# EAGLE board aleph-interface130507 (EAGLE 6.4)
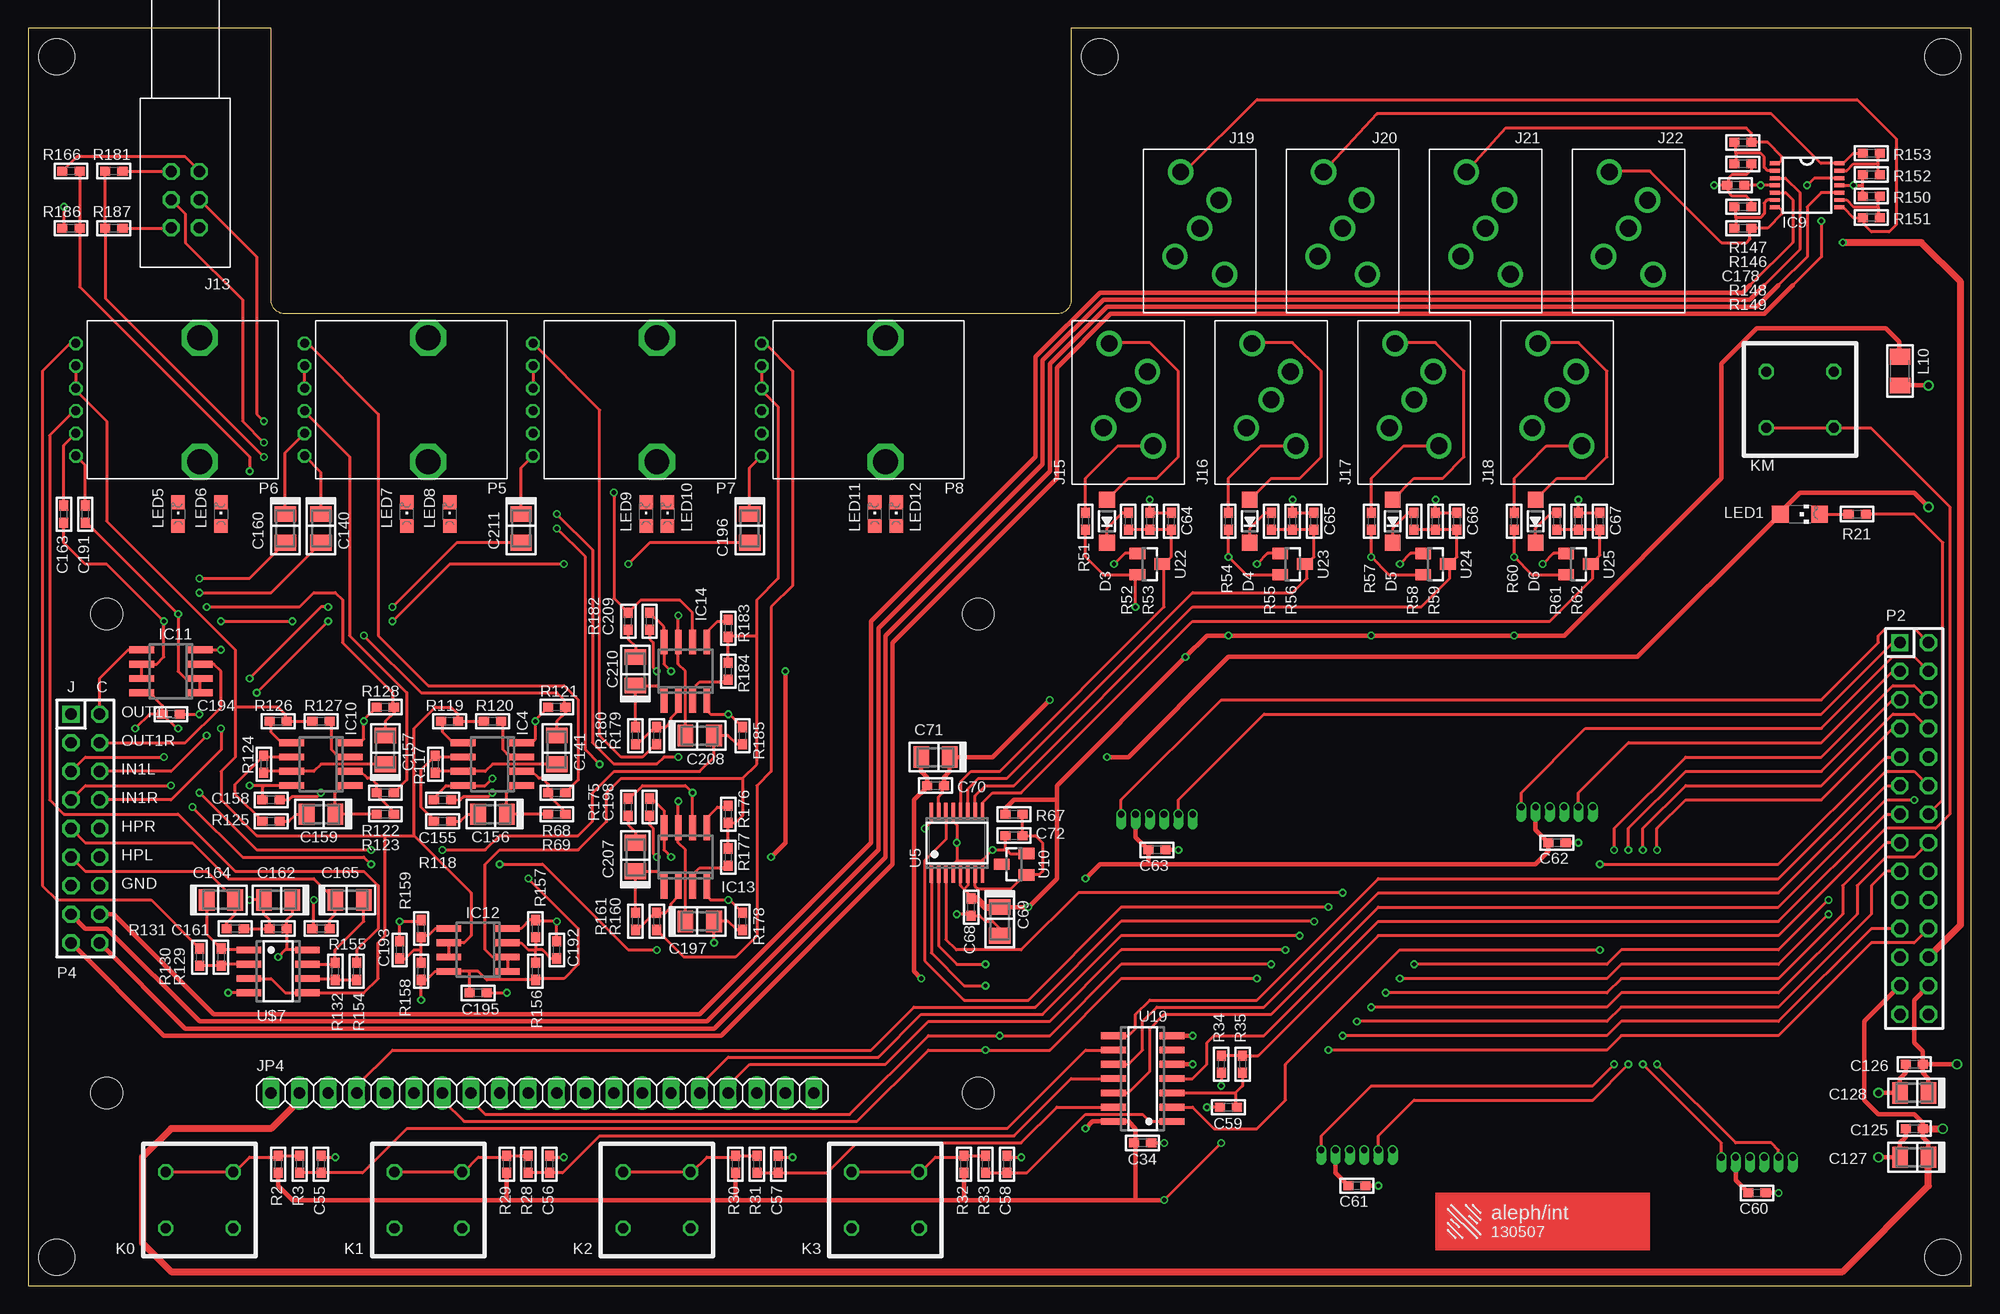
[diagram p0: board, top side]
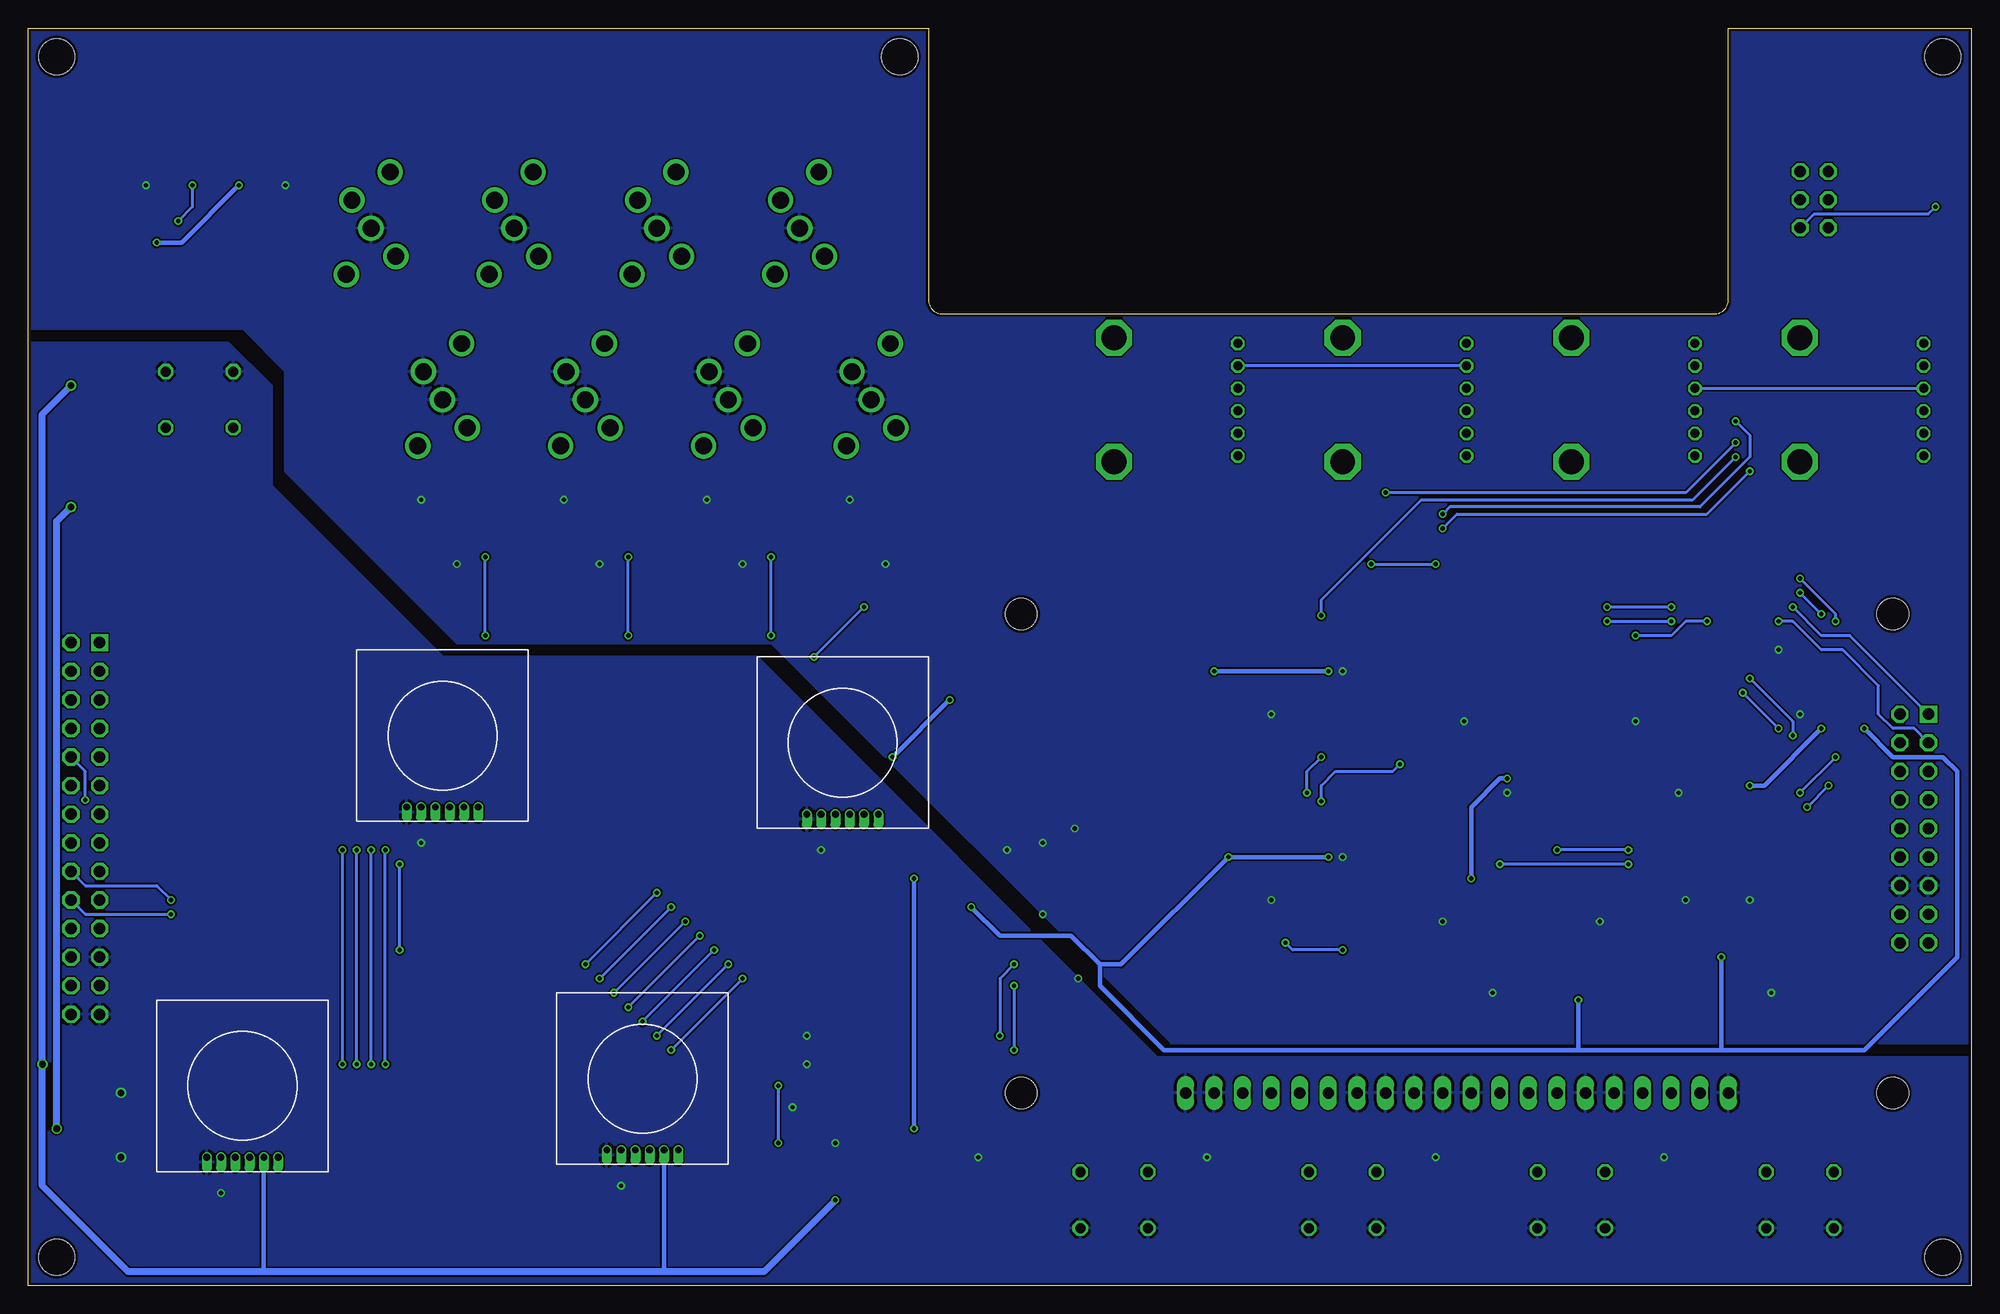
[diagram p1: board, bottom side, seen from below]

Size 172.72 x 111.76 mm. Coordinates in mm from the lower left corner, seen from the top.
Outline: 0,0 172.72,0 172.72,111.76 92.71,111.76 92.71,87.63 arc-90 91.44,86.36 22.86,86.36 arc-90 21.59,87.63 21.59,111.76 0,111.76 0,0
Copper layers (1*2+3*16): Top 0.035mm / dielectric 1.5mm / Route2 0.035mm / dielectric 0.15mm / Route3 0.035mm / dielectric 0.2mm / Bottom 0.035mm
Design rules "default *": minimum track width 6mil, minimum drill 15mil, track to track 6mil, track to pad 6mil, pad to pad 6mil, via to via 6mil, smd to smd 6mil, copper to edge 10mil, drill to drill 8mil, minimum pad ring 6mil, minimum via ring 6mil, stop-mask expansion 4mil, vias tented up to drill 0mil, thermal gap 10mil
Holes 3.2 mm at 2.54,2.54 2.54,109.22 170.18,109.22 170.18,2.54 95.25,109.22
Holes 2.8 mm at 6.99,59.69 84.45,59.69 84.45,17.14 6.99,17.14

## Footprints (pad centres in the part's own frame; a part is rotated, then mirrored left to right if it is on the bottom)
C0603 = smd 0.9 x 0.8: 1 -0.762,0; 2 0.762,0
C1206/T = smd 1.4 x 1.9: + 1.27,0; - -1.27,0
SOD123 = smd 1.4 x 1.4: A 1.905,0; C -1.905,0
SO8 = smd 0.6 x 2.2: 1 -1.905,-2.6; 2 -0.635,-2.6; 3 0.635,-2.6; 4 1.905,-2.6; 5 1.905,2.6; 6 0.635,2.6; 7 -0.635,2.6; 8 -1.905,2.6
TSSOP14 = smd 0.9 x 0.35: 1 -2.875,1.95; 2 -2.875,1.3; 3 -2.875,0.65; 4 -2.875,0; 5 -2.875,-0.65; 6 -2.875,-1.3; 7 -2.875,-1.95; 8 2.875,-1.95; 9 2.875,-1.3; 10 2.875,-0.65; 11 2.875,0; 12 2.875,0.65; 13 2.875,1.3; 14 2.875,1.95
PHA2U = drill 1 octagon: 0 -1.25,0; 1 -1.25,-2.5; 2 -1.25,2.5; _0 1.25,0; _1 1.25,-2.5; _2 1.25,2.5
STX-3680 = drill 1.5: 1 2.2,-4.1; 2 -2.2,-2.5; 3 1.7,2.5; 4 -1.7,5; 5 0,0
1X20 = drill 1.016 long: 1 -24.13,0; 2 -21.59,0; 3 -19.05,0; 4 -16.51,0; 5 -13.97,0; 6 -11.43,0; 7 -8.89,0; 8 -6.35,0; 9 -3.81,0; 10 -1.27,0; 11 1.27,0; 12 3.81,0; 13 6.35,0; 14 8.89,0; 15 11.43,0; 16 13.97,0; 17 16.51,0; 18 19.05,0; 19 21.59,0; 20 24.13,0
PVA1 = drill 0.9 octagon: 1 -3,-2.5; 2 -3,2.5; 3 3,2.5; 4 3,-2.5
L1206 = smd 1.4 x 1.8: 1 -1.27,0; 2 1.27,0
CHIPLED_1206 = smd 1.5 x 1.5: A 0,-1.75; C 0,1.75
CHIPLED_0805 = smd 1.2 x 1.2: A 0,-1.05; C 0,1.05
DIL-100-2X14 = drill 1.016 square: 1 -16.51,-1.27 | drill 1.016 octagon: 2 -16.51,1.27; 3 -13.97,-1.27; 4 -13.97,1.27; 5 -11.43,-1.27; 6 -11.43,1.27; 7 -8.89,-1.27; 8 -8.89,1.27; 9 -6.35,-1.27; 10 -6.35,1.27; 11 -3.81,-1.27; 12 -3.81,1.27; 13 -1.27,-1.27; 14 -1.27,1.27; 15 1.27,-1.27; 16 1.27,1.27; 17 3.81,-1.27; 18 3.81,1.27; 19 6.35,-1.27; 20 6.35,1.27; 21 8.89,-1.27; 22 8.89,1.27; 23 11.43,-1.27; 24 11.43,1.27; 25 13.97,-1.27; 26 13.97,1.27; 27 16.51,-1.27; 28 16.51,1.27
DIL-100-2X09 = drill 1.016 square: 1 -10.16,-1.27 | drill 1.016 octagon: 2 -10.16,1.27; 3 -7.62,-1.27; 4 -7.62,1.27; 5 -5.08,-1.27; 6 -5.08,1.27; 7 -2.54,-1.27; 8 -2.54,1.27; 9 0,-1.27; 10 0,1.27; 11 2.54,-1.27; 12 2.54,1.27; 13 5.08,-1.27; 14 5.08,1.27; 15 7.62,-1.27; 16 7.62,1.27; 17 10.16,-1.27; 18 10.16,1.27
EVJ-POT = drill 0.8 octagon: 1 -5,-11; 2 -3,-11; 3 -1,-11; 4 1,-11; 5 3,-11; 6 5,-11 | drill 2.2 octagon: M1 -5.5,0; M2 5.5,0
R0603 = smd 0.9 x 0.8: 1 -0.762,0; 2 0.762,0
TSSOP16 = smd 0.3 x 1.5: 1 -2.275,-2.8; 2 -1.625,-2.8; 3 -0.975,-2.8; 4 -0.325,-2.8; 5 0.325,-2.8; 6 0.975,-2.8; 7 1.625,-2.8; 8 2.275,-2.8; 9 2.275,2.8; 10 1.625,2.8; 11 0.975,2.8; 12 0.325,2.8; 13 -0.325,2.8; 14 -0.975,2.8; 15 -1.625,2.8; 16 -2.275,2.8
SOT23 = smd 1 x 1.4: 1 -0.95,-1.1; 2 0.95,-1.1; 3 0,1.1
SO14 = smd 0.6 x 2.2: 1 -3.81,-2.6; 2 -2.54,-2.6; 3 -1.27,-2.6; 4 0,-2.6; 5 1.27,-2.6; 6 2.54,-2.6; 7 3.81,-2.6; 8 3.81,2.6; 9 2.54,2.6; 10 1.27,2.6; 11 0,2.6; 12 -1.27,2.6; 13 -2.54,2.6; 14 -3.81,2.6
BOURNS-EM14 = drill 0.6 pad 0.813 offset: P$1 -3.175,-6.35; P$2 -1.905,-6.35; P$3 -0.635,-6.35; P$4 0.635,-6.35; P$5 1.905,-6.35; P$6 3.175,-6.35
SO08 = smd 0.6 x 2.2: 1 -1.905,-2.6; 2 -0.635,-2.6; 3 0.635,-2.6; 4 1.905,-2.6; 5 1.905,2.6; 6 0.635,2.6; 7 -0.635,2.6; 8 -1.905,2.6

## Placement (x,y rotation side)
C34  100n  [C0603]  99.06,12.7 180 top
C55  1u  [C0603]  26.04,10.79 270 top
C56  1u  [C0603]  46.35,10.79 270 top
C57  1u  [C0603]  66.67,10.79 270 top
C58  1u  [C0603]  87,10.79 270 top
C59  1u  [C0603]  106.68,15.88 0 top
C60  100n  [C0603]  153.67,8.26 180 top
C61  100n  [C0603]  118.11,8.89 180 top
C62  100n  [C0603]  135.89,39.37 180 top
C63  100n  [C0603]  100.33,38.73 180 top
C64  10n  [C0603]  101.6,67.94 90 top
C65  10n  [C0603]  114.3,67.94 90 top
C66  10n  [C0603]  127,67.94 90 top
C67  10n  [C0603]  139.7,67.94 90 top
C68  100n  [C0603]  83.82,33.66 90 top
C69  10u  [C1206/T]  86.36,32.38 90 top
C70  100n  [C0603]  80.64,44.45 0 top
C71  10u  [C1206/T]  80.64,46.99 0 top
C72  100n  [C0603]  87.63,40.01 0 top
C125  100n  [C0603]  167.64,13.97 0 top
C126  100n  [C0603]  167.64,19.68 0 top
C127  10u  [C1206/T]  167.64,11.43 0 top
C128  10u  [C1206/T]  167.64,17.14 0 top
C140  10u  [C1206/T]  26.04,67.31 90 top
C141  10u  [C1206/T]  46.99,47.62 270 top
C155  100n  [C0603]  36.83,43.18 180 top
C156  10u  [C1206/T]  41.27,41.91 0 top
C157  10u  [C1206/T]  31.75,47.62 270 top
C158  100n  [C0603]  21.59,43.18 180 top
C159  10u  [C1206/T]  26.04,41.91 0 top
C160  10u  [C1206/T]  22.86,67.31 90 top
C161  100n  [C0603]  22.23,31.75 0 top
C162  100u  [C1206/T]  22.23,34.29 0 top
C163  1u  [C0603]  3.17,68.58 270 top
C164  100u  [C1206/T]  17.14,34.29 180 top
C165  100u  [C1206/T]  28.57,34.29 180 top
C178  100n  [C0603]  151.76,97.79 180 top
C191  1u  [C0603]  5.08,68.58 270 top
C192  100n  [C0603]  46.99,29.84 270 top
C193  100n  [C0603]  33.02,29.84 270 top
C194  100n  [C0603]  12.7,50.8 180 top
C195  100n  [C0603]  40.01,26.04 180 top
C196  10u  [C1206/T]  64.14,67.31 90 top
C197  10u  [C1206/T]  59.69,32.38 180 top
C198  100n  [C0603]  55.24,42.55 90 top
C207  10u  [C1206/T]  53.98,38.1 270 top
C208  10u  [C1206/T]  59.69,48.9 180 top
C209  100n  [C0603]  55.24,59.05 90 top
C210  10u  [C1206/T]  53.98,54.61 270 top
C211  10u  [C1206/T]  43.81,67.31 90 top
D3  1N4148W-7  [SOD123]  95.89,67.94 90 top
D4  1N4148W-7  [SOD123]  108.58,67.94 90 top
D5  1N4148W-7  [SOD123]  121.28,67.94 90 top
D6  1N4148W-7  [SOD123]  133.99,67.94 90 top
IC4  AD8607R  [SO8]  41.27,46.35 90 top
IC9  AD8567  [TSSOP14]  158.12,97.79 0 top
IC10  AD8607R  [SO8]  26.04,46.35 90 top
IC11  AD8607R  [SO8]  12.7,54.61 90 top
IC12  AD8607R  [SO8]  40.01,29.84 90 top
IC13  AD8607R  [SO8]  58.42,38.1 0 top
IC14  AD8607R  [SO8]  58.42,54.61 0 top
J13  PHA2U  [PHA2U]  13.97,96.52 180 top
J15  STX-3680  [STX-3680]  97.79,78.74 0 top
J16  STX-3680  [STX-3680]  110.49,78.74 0 top
J17  STX-3680  [STX-3680]  123.19,78.74 0 top
J18  STX-3680  [STX-3680]  135.89,78.74 0 top
J19  STX-3680  [STX-3680]  104.14,93.98 0 top
J20  STX-3680  [STX-3680]  116.84,93.98 0 top
J21  STX-3680  [STX-3680]  129.54,93.98 0 top
J22  STX-3680  [STX-3680]  142.24,93.98 0 top
JP4  OLED  [1X20]  45.72,17.14 0 top
K0  PVA1  [PVA1]  15.24,7.62 180 top
K1  PVA1  [PVA1]  35.56,7.62 180 top
K2  PVA1  [PVA1]  55.88,7.62 180 top
K3  PVA1  [PVA1]  76.2,7.62 180 top
KM  PVA1  [PVA1]  157.48,78.74 0 top
L10  600  [L1206]  166.37,81.28 270 top
LED1  [CHIPLED_1206]  157.48,68.58 270 top
LED5  [CHIPLED_0805]  13.34,68.58 0 top
LED6  [CHIPLED_0805]  17.14,68.58 0 top
LED7  [CHIPLED_0805]  33.66,68.58 0 top
LED8  [CHIPLED_0805]  37.47,68.58 0 top
LED9  [CHIPLED_0805]  54.93,68.58 0 top
LED10  [CHIPLED_0805]  56.83,68.58 0 top
LED11  [CHIPLED_0805]  75.25,68.58 0 top
LED12  [CHIPLED_0805]  77.15,68.58 0 top
P2  M-2X14-DIL-100  [DIL-100-2X14]  167.64,40.64 270 top
P4  M-2X09-DIL-100  [DIL-100-2X09]  5.08,40.64 270 top
P5  EVJ-POT  [EVJ-POT]  35.56,78.74 270 top
P6  EVJ-POT  [EVJ-POT]  15.24,78.74 270 top
P7  EVJ-POT  [EVJ-POT]  55.88,78.74 270 top
P8  EVJ-POT  [EVJ-POT]  76.2,78.74 270 top
R2  82k  [R0603]  22.23,10.79 90 top
R3  18k  [R0603]  24.13,10.79 270 top
R21  150  [R0603]  162.56,68.58 180 top
R28  18k  [R0603]  44.45,10.79 270 top
R29  82k  [R0603]  42.55,10.79 90 top
R30  82k  [R0603]  62.87,10.79 90 top
R31  18k  [R0603]  64.77,10.79 90 top
R32  82k  [R0603]  83.19,10.79 90 top
R33  18k  [R0603]  85.09,10.79 90 top
R34  82k  [R0603]  106.05,19.68 90 top
R35  18k  [R0603]  107.95,19.68 90 top
R51  10k  [R0603]  93.98,67.94 270 top
R52  10k  [R0603]  97.79,67.94 90 top
R53  10k  [R0603]  99.69,67.94 90 top
R54  10k  [R0603]  106.68,67.94 270 top
R55  10k  [R0603]  110.49,67.94 90 top
R56  10k  [R0603]  112.39,67.94 90 top
R57  10k  [R0603]  119.38,67.94 270 top
R58  10k  [R0603]  123.19,67.94 90 top
R59  10k  [R0603]  125.09,67.94 90 top
R60  10k  [R0603]  132.08,67.94 270 top
R61  10k  [R0603]  135.89,67.94 90 top
R62  10k  [R0603]  137.79,67.94 90 top
R67  1k  [R0603]  87.63,41.91 0 top
R68  100k  [R0603]  46.99,43.81 180 top
R69  100k  [R0603]  46.99,41.91 180 top
R117  100k  [R0603]  36.2,46.35 270 top
R118  50k  [R0603]  36.83,41.27 180 top
R119  100k  [R0603]  37.47,50.16 180 top
R120  100k  [R0603]  41.27,50.16 0 top
R121  100k  [R0603]  46.99,51.44 0 top
R122  100k  [R0603]  31.75,43.81 180 top
R123  100k  [R0603]  31.75,41.91 180 top
R124  100k  [R0603]  20.95,46.35 270 top
R125  50k  [R0603]  21.59,41.27 180 top
R126  100k  [R0603]  22.23,50.16 180 top
R127  100k  [R0603]  26.04,50.16 0 top
R128  100k  [R0603]  31.75,51.44 0 top
R129  3k9  [R0603]  17.14,29.21 90 top
R130  3k9  [R0603]  15.24,29.21 270 top
R131  5k  [R0603]  18.41,31.75 180 top
R132  3k9  [R0603]  27.3,27.94 270 top
R146  10k  [R0603]  152.4,99.69 0 top
R147  10k  [R0603]  152.4,101.6 180 top
R148  10k  [R0603]  152.4,95.89 0 top
R149  10k  [R0603]  152.4,93.98 180 top
R150  10k  [R0603]  163.83,96.84 180 top
R151  10k  [R0603]  163.83,94.93 0 top
R152  10k  [R0603]  163.83,98.74 180 top
R153  10k  [R0603]  163.83,100.65 0 top
R154  3k9  [R0603]  29.21,27.94 90 top
R155  5k  [R0603]  26.04,31.75 180 top
R156  100k  [R0603]  45.09,27.94 270 top
R157  100k  [R0603]  45.09,31.75 270 top
R158  100k  [R0603]  34.92,27.94 270 top
R159  100k  [R0603]  34.92,31.75 270 top
R160  100k  [R0603]  55.88,32.38 90 top
R161  100k  [R0603]  53.98,32.38 90 top
R166  100k  [R0603]  3.81,99.06 0 top
R175  50k  [R0603]  53.34,42.55 90 top
R176  100k  [R0603]  62.23,41.91 90 top
R177  100k  [R0603]  62.23,38.1 270 top
R178  100k  [R0603]  63.5,32.38 270 top
R179  100k  [R0603]  55.88,48.9 90 top
R180  100k  [R0603]  53.98,48.9 90 top
R181  100k  [R0603]  7.62,99.06 180 top
R182  50k  [R0603]  53.34,59.05 90 top
R183  100k  [R0603]  62.23,58.42 90 top
R184  100k  [R0603]  62.23,54.61 270 top
R185  100k  [R0603]  63.5,48.9 270 top
R186  5M  [R0603]  3.81,93.98 0 top
R187  5M  [R0603]  7.62,93.98 180 top
U5  AD7923  [TSSOP16]  82.55,39.37 0 top
U10  LM4040M3  [SOT23]  87.63,37.47 90 top
U19  74HC14D  [SO14]  99.06,18.41 90 top
U22  BAS70-04  [SOT23]  99.69,64.14 270 top
U23  BAS70-04  [SOT23]  112.39,64.14 270 top
U24  BAS70-04  [SOT23]  125.09,64.14 270 top
U25  BAS70-04  [SOT23]  137.79,64.14 270 top
U$2  BOURNS-EM14  [BOURNS-EM14]  153.67,17.78 0 bottom
U$3  BOURNS-EM14  [BOURNS-EM14]  118.11,18.42 0 bottom
U$4  BOURNS-EM14  [BOURNS-EM14]  135.89,48.9 0 bottom
U$5  BOURNS-EM14  [BOURNS-EM14]  100.33,48.26 0 bottom
U$7  [SO08]  22.23,27.94 270 top

## Library data of the parts
C34 C55-C72 C125-C128 C140 C141 C155-C165 C178 C191-C198 C207-C211 L10 R2 R3 R21 R28-R35 R51-R62 R67-R69 R117-R132 R146-R161 R166 R175-R187 = rc-master-smd
D3-D6 U10 U22-U25 = diode
IC4 IC10-IC14 = analog-devices; MPN: AD8607ARMZ-R2; OC_FARNELL: 1651293; OC_NEWARK: 19M8927
IC9 = analog-devices; MPN: AD8544ARUZ; OC_FARNELL: unknown; OC_NEWARK: 15P1001
J13 J15-J22 K0 K1-K3 KM P5-P8 U5 U$2-U$5 U$7 = monome-inc
JP4 = pinhead
LED1 LED5-LED12 = led
P2 P4 = con-headers-jp
U19 = 74xx-us

## Nets
+3V3: C70.2 C71.+ C125.2 C127.+ JP4.2 LED1.A P2.25 U5.15
+5V: C34.2 C60.2 C61.2 C62.2 C63.2 C126.2 C128.+ L10.2 P2.26 R2.1 R29.1 R30.1 R32.1 R34.1 U19.14 U$2.P$5 U$3.P$5 U$4.P$5 U$5.P$5
+5VA: C68.2 C69.+ C155.2 C158.2 C161.2 C162.+ C194.2 C195.2 C198.2 C209.2 IC4.8 IC10.8 IC11.8 IC12.8 IC13.8 IC14.8 L10.1 R51.2 R54.2 R57.2 R60.2 R67.1 R156.2 R158.2 U5.5 U5.6 U22.2 U23.2 U24.2 U25.2 U$7.8
+12V: C178.1 IC9.4 P2.24
AGND: C64.2 C65.2 C66.2 C67.2 C68.1 C69.- C72.1 C155.1 C158.1 C161.1 C162.- C178.2 C192.1 C193.1 C194.1 C195.1 C198.1 C209.1 IC4.4 IC9.11 IC10.4 IC11.4 IC12.4 IC13.4 IC14.4 J15.3 J15.5 J16.3 J16.5 J17.3 J17.5 J18.3 J18.5 J19.5 J20.5 J21.5 J22.5 P4.13 P4.14 R53.2 R56.2 R59.2 R62.2 R121.1 R128.1 R131.1 R146.2 R148.2 R150.2 R152.2 R155.2 R157.1 R159.1 R178.1 R185.1 U5.4 U5.8 U5.13 U5.16 U10.2 U22.1 U23.1 U24.1 U25.1 U$7.4
CVOUT1^: IC9.3 P4.15
CVOUT2^: IC9.5 P4.16
CVOUT3^: IC9.10 P4.18
CVOUT4^: IC9.12 P4.17
ENC0A^: P2.7 U$2.P$2
ENC0B^: P2.8 U$2.P$6
ENC1A^: P2.5 U$3.P$2
ENC1B^: P2.6 U$3.P$6
ENC2A^: P2.3 U$4.P$2
ENC2B^: P2.4 U$4.P$6
ENC3A^: P2.1 U$5.P$2
ENC3B^: P2.2 U$5.P$6
GAINL-1: IC14.6 J13._0 R182.2
GAINL-2: C208.+ IC14.7 R181.2 R187.2
GAINR-1: IC13.6 J13.0 R175.2
GAINR-2: C197.+ IC13.7 R166.2 R186.2
GND: C34.1 C55.1 C56.1 C57.1 C58.1 C59.1 C60.1 C61.1 C62.1 C63.1 C70.1 C71.- C125.1 C126.1 C127.- C128.- JP4.1 JP4.5 JP4.6 JP4.10 JP4.11 JP4.12 JP4.13 JP4.14 JP4.19 JP4.20 K0.2 K0.3 K1.2 K1.3 K2.2 K2.3 K3.2 K3.3 KM.2 KM.3 P2.23 P2.27 P2.28 U19.5 U19.7 U$2.P$1 U$3.P$1 U$4.P$1 U$5.P$1
HP-L^: C165.+ P4.9 R155.1
HP-R^: C164.- P4.11 R131.2
IN1-L^: C208.- P4.5 R185.2
IN1-LP^: C211.- P4.6
IN1-R^: C197.- P4.7 R178.2
IN1-RP^: C196.- P4.8
IN-VREF: IC12.1 IC12.2 P7.2 P7.3 P8.2 P8.3 R176.1 R177.1 R183.1 R184.1
KEY0^: P2.12 U19.8
KEY1^: P2.11 U19.10
KEY2^: P2.10 U19.12
KEY3^: P2.9 U19.2
MODE-KEY^: P2.13 U19.4
MODE-LED^: P2.14 R21.1
N$1: IC9.2 R146.1 R147.2
N$2: K0.1 K0.4 R2.2 R3.1
N$8: C55.2 R3.2 U19.9
N$10: K1.1 K1.4 R28.1 R29.2
N$11: C56.2 R28.2 U19.11
N$20: LED1.C R21.2
N$21: K2.1 K2.4 R30.2 R31.2
N$23: C57.2 R31.1 U19.13
N$27: K3.1 K3.4 R32.2 R33.2
N$30: C58.2 R33.1 U19.1
N$33: J17.1 R57.1
N$34: D3.A J15.4
N$37: D4.C R55.2
N$39: D3.C R52.2
N$40: D5.C R58.2
N$41: J16.1 R54.1
N$42: D4.A J16.4
N$43: KM.1 KM.4 R34.2 R35.2
N$46: D6.C R61.2
N$47: J15.1 R51.1
N$48: D5.A J17.4
N$49: C59.2 R35.1 U19.3
N$51: J18.1 R60.1
N$52: D6.A J18.4
N$56: IC9.1 J21.4 R147.1
N$58: C72.2 R67.2 U5.7 U10.1
N$89: IC4.3 R120.2
N$90: IC4.2 R68.2 R69.1
N$91: C140.+ P5.6
N$93: C156.+ IC4.1 R69.2
N$102: C156.- R118.1
N$103: IC4.6 R117.1 R118.2
N$107: C141.+ IC4.7 R117.2
N$109: IC10.3 R127.2
N$111: IC4.5 R119.2
N$112: P5.1 R68.1
N$113: IC10.2 R122.2 R123.1
N$114: C159.+ IC10.1 R123.2
N$115: C159.- R125.1
N$116: C65.1 R55.1 R56.1 U5.11 U23.3
N$117: C66.1 R58.1 R59.1 U5.10 U24.3
N$118: C67.1 R61.1 R62.1 U5.9 U25.3
N$119: C64.1 R52.1 R53.1 U5.12 U22.3
N$120: IC10.6 R124.1 R125.2
N$121: C157.+ IC10.7 R124.2
N$122: IC10.5 R126.2
N$130: P5.4 R122.1
N$132: IC9.6 R148.1 R149.2
N$135: IC9.9 R150.1 R151.2
N$136: IC9.13 R152.1 R153.2
N$137: IC9.8 J19.4 R151.1
N$138: IC9.14 J20.4 R153.1
N$139: IC9.7 J22.4 R149.1
N$140: C160.+ P5.5
N$141: R129.1 R130.2 U$7.2
N$148: C164.+ R129.2 U$7.1
N$149: C163.1 P6.5
N$150: R132.2 R154.1 U$7.6
N$151: C191.1 P6.6
N$152: C192.2 IC12.3 R156.1 R157.2
N$153: IC13.3 R177.2
N$154: C165.- R132.1 U$7.7
N$155: IC13.2 R160.2 R161.1
N$156: P6.4 R154.2
N$157: P6.1 R130.1
N$158: C207.+ IC13.1 R161.2
N$159: C207.- R175.1
N$162: IC13.5 R176.2
N$163: C193.2 IC12.5 R158.1 R159.2
N$164: C196.+ P8.6
N$165: P8.1 R160.1
N$166: IC14.3 R184.2
N$167: IC14.2 R179.2 R180.1
N$168: C210.+ IC14.1 R180.2
N$169: C210.- R182.1
N$172: IC14.5 R183.2
N$173: P7.1 R179.1
N$174: C211.+ P7.6
N$177: J13.1 R166.1
N$180: J13.2 R186.1
N$181: J13._1 R181.1
N$183: J13._2 R187.1
OLED-DC^: JP4.4 P2.15
OLED-RES^: JP4.16 P2.16
OUT1-L^: C157.- P4.1 R128.2
OUT1-LB: C160.- C163.2 IC11.6 IC11.7
OUT1-LP^: IC11.5 P4.2
OUT1-R^: C141.- P4.3 R121.2
OUT1-RB: C140.- C191.2 IC11.1 IC11.2
OUT1-RP^: IC11.3 P4.4
OUT-VREF: IC12.6 IC12.7 P5.2 P5.3 P6.2 P6.3 R119.1 R120.1 R126.1 R127.1 U$7.3 U$7.5
SPI1-CS0^: JP4.17 P2.17
SPI1-CS1^: P2.18 U5.3
SPI1-MISO^: P2.20 U5.14
SPI1-MOSI^: JP4.8 P2.21 U5.2
SPI1-SCK^: JP4.7 P2.22 U5.1

## Tracks (layer width: path | path; a pad name or v marks a point on that pad's centre or on a via)
+3V3  (via drill 0.38, 0.6)
  Top 0.254: 155.73,68.73 LED1.A | U5.15 80.92,43.46 81.28,43.81 81.28,44.32 C70.2
  Top 0.406: C70.2 81.41,45.21 81.92,45.72 C71.+ 85.72,46.99 v90.81,52.07 | C127.+ 168.91,12.7 168.4,13.21 C125.2 168.4,14.48 167.64,15.24 164.47,15.24 163.19,16.51 163.19,23.5 P2.25 | v168.91,69.22 167.64,70.48 157.48,70.48 155.73,68.73 | v95.89,46.99 97.79,46.99 106.68,55.88 143.03,55.88 LED1.A
  Top 0.61: C125.2 v170.18,13.97 | JP4.2 24.13,16.51 21.59,13.97 12.7,13.97 10.16,11.43 10.16,3.81 12.7,1.27 161.29,1.27 168.91,8.89 C127.+
  Bottom 0.406: v90.81,52.07 v95.89,46.99
  Bottom 0.61: v170.18,13.97 170.18,67.94 v168.91,69.22
+5V  (via drill 0.38, 0.6)
  Top 0.254: 98.42,12.83 C34.2 | R34.1 v106.05,17.78 | v106.05,12.7 v100.97,7.62
  Top 0.406: C128.+ 168.91,18.41 168.4,18.92 C126.2 | 62.87,7.62 83.19,7.62 | 83.19,7.62 98.42,7.62 | 98.42,7.62 v100.97,7.62 | 62.87,7.62 42.55,7.62 | 42.55,7.62 23.5,7.62 22.23,8.89 R2.1 | 42.55,7.62 R29.1 | R30.1 62.87,7.62 | 83.19,7.62 R32.1 | U$5.P$5 98.42,39.88 C63.2 99.57,37.59 99.69,37.47 | U$4.P$5 133.99,40.51 C62.2 135.13,38.61 133.99,37.47 99.69,37.47 | U$2.P$5 151.76,9.4 C60.2 | U$3.P$5 116.2,10.03 C61.2 | v171.45,19.68 C126.2 | P2.26 167.64,25.4 167.64,21.59 168.4,20.83 C126.2 | 99.69,37.47 95.25,37.47 v93.98,36.2 | v93.98,13.97 94.61,14.61 U19.14 97.79,14.61 98.42,13.97 98.42,12.83 98.42,7.62 | L10.2 v168.91,80.01
  Bottom 0.254: v106.05,17.78 v106.05,12.7
  Bottom 0.406: 116.2,1.27 U$3.P$5 | 151.76,1.27 U$2.P$5 | v93.98,13.97 v93.98,36.2
  Bottom 0.61: v168.91,80.01 171.45,77.47 v171.45,19.68 171.45,8.89 163.83,1.27 151.76,1.27 116.2,1.27 107.31,1.27 v100.97,7.62
+5VA  (via drill 0.38)
  Top 0.254: U5.5 82.88,35.55 83.19,35.24 | C68.2 83.82,34.61 83.19,35.24 | U5.6 83.53,35.58 83.19,35.24 | R51.2 93.98,64.77 95.56,63.19 U22.2 98.42,63.02 v98.42,60.33 | U24.2 120.97,63.19 v119.38,64.77 R57.2 | U23.2 108.27,63.19 v106.68,64.77 R54.2 | U25.2 133.66,63.19 v132.08,64.77 R60.2 | C155.2 36.07,43.37 37.15,44.45 IC4.8 40.64,44.45 v41.27,45.09 | C162.+ 23.5,33.02 22.99,32.51 C161.2 22.99,29.97 22.86,29.84 | 24.13,29.84 U$7.8 22.86,29.84 | C194.2 11.94,51.56 10.79,52.7 IC11.8 | 39.24,27.94 40.01,27.94 40.77,27.18 R156.2 45.21,27.3 47.62,27.3 48.9,28.57 48.9,31.75 v44.45,36.2 | 39.24,27.94 IC12.8 36.2,27.94 35.43,27.18 R158.2 v34.92,25.4 | C195.2 39.24,27.94 | C198.2 55.44,43.31 56.52,42.23 IC13.8 56.52,38.73 v57.15,38.1 | C209.2 56.52,58.55 IC14.8 56.52,55.24 v57.15,54.61 | 22.86,29.84 v22.23,29.21 | C194.2 10.79,50.8 v9.53,49.53 | v13.34,49.53 13.21,49.53 C194.2 | IC10.8 20.95,44.45 | 20.95,44.45 v19.68,44.45 | C158.2 20.83,44.32 20.95,44.45
  Top 0.406: C69.+ v88.9,33.66 91.44,36.2 91.44,43.18 | R67.1 86.87,42.42 87.63,43.18 91.44,43.18 | L10.1 166.31,82.61 166.31,83.88 165.1,85.09 153.67,85.09 150.5,81.92 150.5,71.75 136.53,57.78 v132.08,57.78 v119.38,57.78 v106.68,57.78 104.78,57.78 v102.87,55.88 91.44,44.45 91.44,43.18 | v67.31,54.61 67.31,39.37 v66.04,38.1
  Top 0.61: C68.2 84.33,34.42 85.09,33.66 C69.+
  Bottom 0.254: v106.68,57.78 v106.68,64.77 | v119.38,57.78 v119.38,64.77 | v132.08,57.78 v132.08,64.77 | v102.87,55.88 v98.42,60.33
  Bottom 0.406: v22.23,29.21 22.23,20.95 | 22.23,20.95 34.92,20.95 | 34.92,20.95 v34.92,25.4 | v57.15,38.1 v66.04,38.1 75.56,28.57 77.47,28.57 | 34.92,20.95 71.75,20.95 77.47,26.67 77.47,28.57 | v57.15,54.61 v67.31,54.61 | 77.47,28.57 80.01,31.11 86.36,31.11 v88.9,33.66 | v41.27,45.09 41.91,45.09 44.45,42.55 v44.45,36.2 | v9.53,49.53 6.99,46.99 2.54,46.99 1.27,45.72 1.27,29.21 9.53,20.95 22.23,20.95 | v19.68,44.45 18.41,44.45 v13.34,49.53
+12V  (via drill 0.38)
  Top 0.254: IC9.4 v153.99,97.79 C178.1
  Top 0.61: P2.24 171.77,32.07 171.77,89.22 168.28,92.71 v161.29,92.71
  Bottom 0.406: v161.29,92.71 159.07,92.71 v153.99,97.79
AGND  (via drill 0.38)
  Top 0.254: C69.- 86.36,31.75 85.72,32.38 85.09,32.38 84.58,32.89 C68.1 83.82,33.02 v82.55,33.02 | U5.4 82.22,37.46 82.55,37.78 | 84.83,37.41 U5.8 84.83,37.84 | 82.55,37.78 v82.55,39.37 82.55,40.96 82.22,41.27 U5.13 82.23,42.18 | 84.83,37.84 v85.72,38.73 87,38.73 | U10.2 87.31,38.41 87,38.73 | C72.1 86.87,38.86 87,38.73 | 82.55,37.78 84.77,37.78 84.83,37.84 | C64.2 R53.2 v99.69,69.85 | U22.1 97.47,65.08 v96.52,64.14 | U23.1 110.17,65.08 v109.22,64.14 | U24.1 122.87,65.08 v121.92,64.14 | v112.39,69.85 R56.2 C65.2 | C66.2 R59.2 v125.09,69.85 | C67.2 R62.2 v137.79,69.85 | U25.1 135.57,65.08 v134.62,64.14 | U5.16 80.28,41.22 v79.69,40.64 | IC9.11 v162.24,97.79 163.07,97.79 | C178.2 v149.86,97.79 | R150.2 163.07,97.79 | 163.07,97.79 R152.2 | R148.2 153.16,96.39 152.72,96.84 151.45,96.84 151.13,97.16 151.13,97.66 C178.2 | R146.2 153.16,99.19 152.72,98.74 151.45,98.74 151.13,98.42 151.13,97.92 C178.2 | IC4.4 44.77,48.26 45.09,48.58 v45.09,50.16 45.09,50.29 R121.1 | IC10.4 29.53,48.26 29.84,48.58 v29.84,50.16 29.84,50.29 R128.1 | C155.1 38.42,43.18 38.73,43.5 40.96,43.5 v41.27,43.81 | C158.1 23.18,43.18 23.5,43.5 25.72,43.5 v26.04,43.81 | R131.1 C161.1 21.46,32.51 20.95,33.02 C162.- v19.68,34.29 | U$7.4 v17.78,26.04 | IC11.4 v17.14,56.52 | C194.1 v15.24,50.8 | R155.2 25.4,31.75 v25.4,34.29 | C193.1 v33.02,32.38 34.8,32.38 R159.1 | IC12.4 43.81,31.75 44.58,32.51 R157.1 45.21,32.38 v46.99,32.38 C192.1 | C195.1 v42.55,26.04 | IC13.4 60.33,34.61 60.64,34.29 v62.23,34.29 62.36,34.29 R178.1 | IC14.4 60.33,51.12 60.64,50.8 v62.23,50.8 62.36,50.8 R185.1 | C198.1 55.24,40.96 55.56,40.64 55.56,38.42 v55.88,38.1 | C209.1 55.24,57.47 55.56,57.15 55.56,54.93 v55.88,54.61
  pour Bottom: 92.71,111.76 172.72,111.76 172.72,85.09 153.67,85.09 149.86,81.28 149.86,72.39 134.62,57.15 106.68,57.15 71.12,21.59 0,21.59 0,111.76 21.59,111.76 21.59,87.63 arc90 22.86,86.36 91.44,86.36 arc90 92.71,87.63
CVOUT1^
  Top 0.254: IC9.3 156.19,98.44 157.48,97.16 157.48,92.08 154.31,88.9
  Top 0.406: P4.15 5.08,31.75 6.99,31.75 15.24,23.5 60.33,23.5 75.56,38.73 75.56,58.42 90.17,73.03 90.17,82.23 95.57,87.63 153.03,87.63 154.31,88.9
CVOUT2^
  Top 0.254: IC9.5 156.22,97.14 156.84,96.52 156.84,92.71 153.03,88.9
  Top 0.406: P4.16 7.62,33.02 16.51,24.13 59.69,24.13 74.93,39.37 74.93,59.05 89.53,73.66 89.53,82.55 95.25,88.27 152.4,88.27 153.03,88.9
CVOUT3^
  Top 0.254: IC9.10 159.37,97.14 158.12,95.89 158.12,91.44 155.57,88.9
  Top 0.406: P4.18 13.97,22.86 60.96,22.86 76.2,38.1 76.2,57.78 90.81,72.39 90.81,81.92 95.89,87 153.67,87 155.57,88.9
CVOUT4^  (via drill 0.38)
  Top 0.254: IC9.12 158.76,98.44 v158.12,97.79 | v159.38,94.61 159.38,91.44 156.84,88.9
  Top 0.406: P4.17 12.06,22.23 61.59,22.23 76.83,37.47 76.83,57.15 91.44,71.75 91.44,81.6 96.2,86.36 154.31,86.36 156.84,88.9
  Bottom 0.254: v158.12,97.79 158.12,95.89 v159.38,94.61
ENC0A^  (via drill 0.38)
  Top 0.254: P2.7 165.74,49.53 159.38,43.18 147.32,43.18 144.78,40.64 v144.78,38.73 | U$2.P$2 155.57,12.06 154.94,12.7 151.76,12.7 v144.78,19.68
  Bottom 0.254: v144.78,19.68 v144.78,38.73
ENC0B^  (via drill 0.38)
  Top 0.254: P2.8 167.64,50.8 165.74,50.8 159.38,44.45 147.32,44.45 143.51,40.64 v143.51,38.73 | U$2.P$6 150.5,12.7 v143.51,19.68
  Bottom 0.254: v143.51,19.68 v143.51,38.73
ENC1A^  (via drill 0.38)
  Top 0.254: P2.5 165.74,52.07 159.38,45.72 147.32,45.72 142.24,40.64 v142.24,38.73 | U$3.P$2 120.02,13.34 123.19,16.51 139.06,16.51 v142.24,19.68
  Bottom 0.254: v142.24,19.68 v142.24,38.73
ENC1B^  (via drill 0.38)
  Top 0.254: P2.6 167.64,53.34 165.74,53.34 159.38,46.99 147.32,46.99 140.97,40.64 v140.97,38.73 | U$3.P$6 114.94,13.34 119.38,17.78 139.06,17.78 v140.97,19.68
  Bottom 0.254: v140.97,19.68 v140.97,38.73
ENC2A^
  Top 0.254: P2.3 165.74,54.61 159.38,48.26 142.24,48.26 137.79,43.81 U$4.P$2
ENC2B^
  Top 0.254: P2.4 167.64,55.88 165.74,55.88 159.38,49.53 138.43,49.53 132.72,43.81 U$4.P$6
ENC3A^
  Top 0.254: P2.1 165.74,57.15 159.38,50.8 109.86,50.8 102.23,43.18 U$5.P$2
ENC3B^
  Top 0.254: P2.2 167.64,58.42 165.1,58.42 164.47,57.78 164.47,57.15 159.38,52.07 106.05,52.07 97.16,43.18 U$5.P$6
GAINL-1  (via drill 0.38)
  Top 0.254: IC14.6 59.05,59.82 57.91,60.96 54.48,60.96 R182.2 52.07,61.09 v52.07,70.48 | J13._0 12.72,96.5 13.97,95.25 13.97,92.71 19.05,87.63 19.05,76.83 v20.95,74.93
  Bottom 0.254: v20.95,74.93 25.4,70.48 v52.07,70.48
GAINL-2  (via drill 0.38)
  Top 0.254: v57.78,59.56 IC14.7 57.78,55.24 58.42,54.61 C208.+ | R181.2 R187.2 6.86,87.76 v20.95,73.66
  Bottom 0.254: v57.78,59.56 57.78,60.96 48.9,69.85 24.77,69.85 v20.95,73.66
GAINR-1  (via drill 0.38)
  Top 0.254: IC13.6 v59.05,43.81 58.42,44.45 54.61,44.45 53.47,43.31 R175.2 | J13.0 15.24,96.52 20.32,91.44 20.32,77.47 v20.95,76.83 | v57.78,46.99 56.52,46.99 55.88,46.35 52.07,46.35 50.16,48.26 50.16,65.41 v46.99,68.58
  Bottom 0.254: v59.05,43.81 59.05,45.72 v57.78,46.99 | v20.95,76.83 19.68,75.56 19.68,73.66 24.13,69.22 46.35,69.22 v46.99,68.58
GAINR-2  (via drill 0.38)
  Top 0.254: v57.78,43.05 IC13.7 57.78,39.37 58.42,38.73 C197.+ | R166.2 R186.2 4.57,88.77 19.68,73.66 v19.68,72.39 | v50.8,46.35 49.53,47.62 49.53,64.77 v46.99,67.31
  Bottom 0.254: v57.78,43.05 57.78,44.45 56.52,45.72 51.44,45.72 v50.8,46.35 | v46.99,67.31 45.72,68.58 23.5,68.58 v19.68,72.39
GND  (via drill 0.38, 0.6)
  Top 0.254: C55.1 26.04,11.43 v27.3,11.43 | C56.1 46.35,11.43 v47.62,11.43 | C57.1 66.67,11.43 v67.94,11.43 | C58.1 87,11.43 v88.27,11.43 | C34.1 v100.97,12.7 | C59.1 v104.78,15.88
  Top 0.406: C71.- 79.38,45.72 79.88,45.21 C70.1 79.88,44.32 78.74,43.18 78.74,27.94 v79.38,27.3 | C62.1 v137.79,39.37 | C63.1 v102.23,38.73 | C60.1 v155.57,8.26 | C125.1 166.88,13.21 166.37,12.7 C127.- v164.47,11.43 | C126.1 166.88,18.92 166.37,18.41 C128.- v164.47,17.14 | C61.1 v120.02,8.89 | U19.7 v103.5,22.23 | U19.5 v103.5,19.68
  pour Bottom: 0,20.32 0,0 172.72,0 172.72,83.82 154.94,83.82 151.13,80.01 151.13,71.12 135.89,55.88 107.95,55.88 72.39,20.32
HP-L^
  Top 0.254: R155.1 26.8,32.51 27.3,33.02 C165.+ 25.4,36.2 17.78,36.2 14.61,39.37 5.08,39.37 P4.9
HP-R^
  Top 0.254: R131.2 17.65,32.26 18.41,33.02 C164.- 15.88,36.83 5.08,36.83 P4.11
IN1-L^  (via drill 0.38)
  Top 0.254: R185.2 62.99,48.13 62.23,48.9 C208.- 60.96,46.99 59.69,45.72 52.07,45.72 50.16,43.81 50.16,41.27 48.9,40.01 41.91,40.01 40.64,38.73 v36.83,38.73 | P4.5 5.08,46.99 v12.06,46.99 | v15.24,43.81 20.32,38.73 v30.48,38.73
  Bottom 0.254: v12.06,46.99 v15.24,43.81 | v30.48,38.73 v36.83,38.73
IN1-LP^  (via drill 0.38)
  Top 0.254: C211.- 38.1,66.04 v32.38,60.33 | v26.67,60.33 26.04,60.33 v19.68,53.98 | v15.88,48.9 12.7,45.72 P4.6
  Bottom 0.254: v32.38,60.33 v26.67,60.33 | v19.68,53.98 15.88,50.16 v15.88,48.9
IN1-R^  (via drill 0.38)
  Top 0.254: R178.2 62.99,31.62 62.23,32.38 C197.- v60.96,30.48 | P4.7 5.08,44.45 v12.7,44.45 | v14.61,42.55 19.05,38.1 29.84,38.1 v30.48,37.47 | v41.91,37.47 45.72,37.47 53.34,29.84 v55.88,29.84
  Bottom 0.254: v12.7,44.45 v14.61,42.55 | v30.48,37.47 v41.91,37.47 | v55.88,29.84 60.33,29.84 v60.96,30.48
IN1-RP^  (via drill 0.38)
  Top 0.254: C196.- 55.24,66.04 v53.34,64.14 | v47.62,64.14 37.47,64.14 v32.38,59.05 | v26.67,59.05 v20.32,52.7 | v17.14,49.53 17.14,47.62 12.7,43.18 P4.8
  Bottom 0.254: v53.34,64.14 v47.62,64.14 | v32.38,59.05 v26.67,59.05 | v20.32,52.7 v17.14,49.53
IN-VREF
  Top 0.254: 62.36,55.24 R184.1 R183.1 62.36,57.78 64.77,57.78 | 63.5,45.09 52.7,45.09 51.44,43.81 51.44,41.27 48.9,38.73 41.91,38.73 40.64,37.47 40.64,29.84 41.27,29.21 IC12.2 IC12.1 | 63.5,45.09 63.5,41.78 62.87,41.15 R176.1 R177.1 | P7.2 P7.3 | P8.2 P8.3 65.2,79.58 66.67,78.11 66.67,62.87 64.77,60.96 64.77,57.78 | 63.5,45.09 64.77,46.35 64.77,57.78
  Bottom 0.254: P7.2 P8.2
KEY0^
  Top 0.254: U19.8 97.79,22.23 98.42,22.86 98.42,24.13 99.69,25.4 109.22,25.4 120.02,36.2 155.57,36.2 165.1,45.72 167.64,45.72 P2.12
KEY1^
  Top 0.254: U19.10 97.79,19.68 99.06,20.95 99.06,23.5 100.33,24.77 109.86,24.77 120.02,34.92 155.57,34.92 165.1,44.45 P2.11
KEY2^  (via drill 0.38)
  Top 0.254: U19.12 97.79,17.14 99.69,19.05 99.69,22.86 100.97,24.13 110.49,24.13 120.02,33.66 155.57,33.66 165.1,43.18 v167.64,43.18
  Bottom 0.254: P2.10 167.64,45.72 v167.64,43.18
KEY3^  (via drill 0.38)
  Top 0.254: U19.2 103.5,15.88 105.41,13.97 109.22,13.97 111.76,16.51 111.76,19.68 121.92,29.84 v139.7,29.84 | P2.9 165.1,46.99 155.57,37.47 v139.7,37.47
  Bottom 0.254: v139.7,29.84 v139.7,37.47
MODE-KEY^
  Top 0.254: U19.4 103.5,18.41 104.78,19.68 104.78,21.59 105.41,22.23 109.86,22.23 120.02,32.38 155.57,32.38 165.1,41.91 P2.13
MODE-LED^
  Top 0.254: P2.14 170.18,43.18 170.18,66.04 167.64,68.58 R21.1
N$1
  Top 0.254: IC9.2 154.59,99.09 154.31,99.38 154.31,100.33 153.99,100.65 151.76,100.65 | 151.76,100.65 151.76,99.82 R146.1 | 151.76,100.65 151.76,101.47 R147.2
N$2
  Top 0.254: K0.4 K0.1 18.28,10.16 18.41,10.16 19.68,11.43 22.1,11.43 R2.2 R3.1
N$8
  Top 0.254: R3.2 C55.2 29.72,10.03 33.66,13.97 87,13.97 93.98,20.95 U19.9
N$10
  Top 0.254: K1.4 K1.1 38.6,10.16 38.73,10.16 40.01,11.43 42.42,11.43 R29.2 R28.1
N$11
  Top 0.254: R28.2 C56.2 47.5,10.03 50.8,13.34 87.63,13.34 92.71,18.41 U19.11
N$20
  Top 0.254: LED1.C R21.2
N$21
  Top 0.254: K2.4 K2.1 59.02,10.12 60.33,11.43 62.74,11.43 R30.2 R31.2
N$23
  Top 0.254: R31.1 C57.2 70.99,10.03 73.66,12.7 88.27,12.7 91.44,15.88 U19.13
N$27
  Top 0.254: K3.4 K3.1 79.24,10.16 79.38,10.16 80.64,11.43 83.06,11.43 R32.2 R33.2
N$30
  Top 0.254: R33.1 C58.2 88.77,10.03 93.98,15.24 99.06,15.24 99.69,14.61 U19.1
N$33
  Top 0.254: R57.1 119.38,71.76 120.65,73.03 122.27,74.64 J17.1
N$34
  Top 0.254: D3.A 97.79,71.75 100.33,71.75 102.23,73.66 102.23,81.28 99.69,83.82 96.17,83.82 J15.4
N$37
  Top 0.254: R55.2 109.98,68.71 108.58,67.31 D4.C
N$39
  Top 0.254: R52.2 97.28,68.71 95.89,67.31 D3.C
N$40
  Top 0.254: R58.2 122.68,68.71 121.28,67.31 D5.C
N$41
  Top 0.254: R54.1 106.68,71.76 107.95,73.03 109.56,74.64 J16.1
N$42
  Top 0.254: D4.A 110.49,71.75 113.03,71.75 114.94,73.66 114.94,81.28 112.39,83.82 108.87,83.82 J16.4
N$43
  Top 0.254: R34.2 R35.2 109.35,20.45 120.02,31.11 155.57,31.11 165.1,40.64 169.54,40.64 170.81,41.91 170.81,69.22 163.79,76.24 KM.4 KM.1
N$46
  Top 0.254: R61.2 135.38,68.71 133.99,67.31 D6.C
N$47
  Top 0.254: R51.1 93.98,71.76 95.89,73.66 96.86,74.64 J15.1
N$48
  Top 0.254: D5.A 123.19,71.75 125.73,71.75 127.64,73.66 127.64,81.28 125.09,83.82 121.57,83.82 J17.4
N$49
  Top 0.254: U19.3 107.31,17.14 | R35.1 107.95,17.78 107.31,17.14 | 107.31,17.14 107.31,16 C59.2
N$51
  Top 0.254: R60.1 132.08,71.76 133.35,73.03 134.97,74.64 J18.1
N$52
  Top 0.254: D6.A 135.89,71.75 138.43,71.75 140.34,73.66 140.34,81.28 137.79,83.82 134.27,83.82 J18.4
N$56
  Top 0.254: IC9.1 155.62,99.74 155.89,100.01 155.89,100.33 154.62,101.6 R147.1 153.16,102.42 152.72,102.87 131.32,102.87 J21.4
N$58
  Top 0.254: U5.7 84.17,35.52 84.45,35.24 87.31,35.24 88.58,36.52 U10.1 89.86,36.52 90.17,36.83 90.17,39.37 89.53,40.01 C72.2 R67.2
N$89
  Top 0.254: IC4.3 42.86,46.99 42.23,47.62 42.23,49.97 R120.2
N$90
  Top 0.254: R69.1 47.75,42.1 46.23,43.62 R68.2 46.23,44.58 45.72,45.09 45.4,45.09 44.77,45.72 IC4.2
N$91
  Top 0.254: C140.+ 26.04,72.27 P5.6
N$93
  Top 0.254: IC4.1 43.18,44.45 42.55,43.81 C156.+ R69.2
N$102
  Top 0.254: C156.- 39.05,41.91 38.42,41.27 R118.1
N$103
  Top 0.254: IC4.6 36.32,46.99 R117.1 | R117.1 36.01,47.12 | R117.1 34.92,45.85 34.92,42.55 36.07,41.4 R118.2
N$107
  Top 0.254: R117.2 36.32,45.72 IC4.7 40.64,45.72 41.27,46.35 C141.+
N$109
  Top 0.254: IC10.3 27.62,46.99 26.99,47.62 26.99,49.97 R127.2
N$111
  Top 0.254: IC4.5 37.78,48.26 36.83,49.21 36.83,50.04 R119.2
N$112
  Top 0.254: P5.1 24.84,83.74 31.11,77.47 31.11,57.78 35.56,53.34 47.62,53.34 48.9,52.07 48.9,44.96 R68.1
N$113
  Top 0.254: R123.1 32.51,42.1 30.99,43.62 R122.2 30.99,44.58 30.48,45.09 30.16,45.09 29.53,45.72 IC10.2
N$114
  Top 0.254: IC10.1 27.94,44.45 27.3,43.81 C159.+ R123.2
N$115
  Top 0.254: C159.- 23.81,41.91 23.18,41.27 R125.1
N$116
  Top 0.254: U5.11 83.53,44.16 84.45,45.09 87,45.09 103.5,61.59 112.39,61.59 113.67,62.87 113.67,63.97 U23.3 113.67,64.14 114.3,64.77 C65.1 R56.1 R55.1
N$117
  Top 0.254: U5.10 84.17,43.53 85.09,44.45 87.63,44.45 103.5,60.33 123.83,60.33 126.36,62.87 126.36,63.97 U24.3 126.36,64.14 127,64.77 C66.1 R59.1 R58.1
N$118
  Top 0.254: U5.9 84.83,42.91 85.72,43.81 88.27,43.81 103.5,59.05 135.25,59.05 139.06,62.87 139.06,63.97 U25.3 139.7,64.94 C67.1 R62.1 R61.1
N$119
  Top 0.254: U5.12 82.88,44.77 83.82,45.72 86.36,45.72 100.97,60.33 100.97,63.97 U22.3 100.97,64.14 101.6,64.77 C64.1 R53.1 R52.1
N$120
  Top 0.254: IC10.6 21.08,46.99 R124.1 | R124.1 20.77,47.12 | R124.1 18.41,44.58 18.41,43.69 R125.2
N$121
  Top 0.254: R124.2 21.08,45.72 IC10.7 25.4,45.72 26.04,46.35 C157.+
N$122
  Top 0.254: IC10.5 22.54,48.26 21.59,49.21 21.59,50.04 R126.2
N$130
  Top 0.254: R122.1 33.66,44.96 33.66,52.7 28.57,57.78 28.57,73.66 24.56,77.67 P5.4
N$132
  Top 0.254: IC9.6 154.59,96.49 154.31,96.2 154.31,95.25 153.99,94.93 151.76,94.93 | 151.76,94.93 151.76,95.76 R148.1 | 151.76,94.93 151.76,94.11 R149.2
N$135
  Top 0.254: IC9.9 161.64,96.49 162.24,95.89 164.47,95.89 | 164.47,95.89 164.47,94.74 R151.2 | 164.47,95.89 164.47,96.71 R150.1
N$136
  Top 0.254: 160.94,99.09 IC9.13 161.64,99.09 162.24,99.69 164.47,99.69 | R152.1 164.47,98.87 164.47,99.69 | 164.47,99.69 164.47,100.52 R153.2
N$137
  Top 0.254: IC9.8 161.34,95.84 162.24,94.93 R151.1 163.19,94.81 163.19,94.3 163.83,93.66 165.42,93.66 166.05,94.3 166.05,101.92 162.56,105.41 109.22,105.41 102.79,98.98 J19.4
N$138
  Top 0.254: R153.1 162.24,100.65 161.34,99.74 IC9.14 159.34,99.74 154.94,104.14 119.89,104.14 J20.4
N$139
  Top 0.254: IC9.7 155.62,95.84 155.89,95.57 155.89,95.25 154.62,93.98 R149.1 153.03,93.85 153.03,93.03 152.72,92.71 150.5,92.71 144.15,99.06 140.62,99.06 J22.4
N$140
  Top 0.254: C160.+ 22.86,74.04 P5.5
N$141
  Top 0.254: U$7.2 17.27,28.57 R129.1 R130.2
N$148
  Top 0.254: U$7.1 17.27,29.84 R129.2 15.88,31.24 C164.+
N$149
  Top 0.254: C163.1 3.17,74.67 P6.5
N$150
  Top 0.254: U$7.6 27.18,27.3 R132.2 R154.1
N$151
  Top 0.254: C191.1 5.08,72.9 P6.6
N$152
  Top 0.254: IC12.3 43.81,30.48 44.45,29.84 45.09,29.84 | R157.2 45.09,29.84 | R156.1 45.09,29.84 | C192.2 46.48,29.08 45.72,29.84 45.09,29.84
N$153
  Top 0.254: IC13.3 59.05,36.51 59.69,37.15 62.04,37.15 R177.2
N$154
  Top 0.254: U$7.7 27.18,28.57 R132.1 27.3,29.84 29.84,32.38 C165.-
N$155
  Top 0.254: R161.1 54.17,31.62 55.69,33.15 R160.2 56.64,33.15 57.15,33.66 57.15,33.97 57.78,34.61 IC13.2
N$156
  Top 0.254: P6.4 4.08,77.74 1.91,75.56 1.91,43.18 3.17,41.91 13.34,41.91 18.41,36.83 29.84,36.83 31.11,35.56 31.11,31.75 29.21,29.84 R154.2
N$157
  Top 0.254: P6.1 3.73,83.74 1.27,81.28 1.27,35.56 2.54,34.29 10.92,34.29 R130.1
N$158
  Top 0.254: IC13.1 56.52,36.2 55.88,36.83 C207.+ R161.2
N$159
  Top 0.254: C207.- 53.98,40.32 53.34,40.96 R175.1
N$162
  Top 0.254: IC13.5 60.33,41.59 61.28,42.55 62.1,42.55 R176.2
N$163
  Top 0.254: IC12.5 36.2,31.75 35.56,31.11 35.05,31.11 R159.2 34.92,29.84 | R158.1 34.92,29.84 | C193.2 33.53,29.08 34.29,29.84 34.92,29.84
N$164
  Top 0.254: C196.+ 64.14,72.67 P8.6
N$165
  Top 0.254: R160.1 58.29,29.21 62.87,29.21 64.77,31.11 64.77,44.45 66.04,45.72 66.04,60.33 67.94,62.23 67.94,81.28 65.48,83.74 P8.1
N$166
  Top 0.254: IC14.3 59.05,53.02 59.69,53.66 62.04,53.66 R184.2
N$167
  Top 0.254: R180.1 54.17,48.13 55.69,49.66 R179.2 56.64,49.66 57.15,50.16 57.15,50.48 57.78,51.12 IC14.2
N$168
  Top 0.254: IC14.1 56.52,52.7 55.88,53.34 C210.+ R180.2
N$169
  Top 0.254: C210.- 53.98,56.83 53.34,57.47 R182.1
N$172
  Top 0.254: IC14.5 60.33,58.1 61.28,59.05 62.1,59.05 R183.2
N$173
  Top 0.254: R179.1 55.75,48.13 54.61,46.99 52.7,46.99 50.8,48.9 50.8,77.82 P7.1
N$174
  Top 0.254: C211.+ 43.81,72.67 P7.6
N$177
  Top 0.254: J13.1 15.22,99.08 13.97,100.33 4.32,100.33 R166.1
N$180  (via drill 0.38)
  Top 0.254: v3.17,95.89 3.17,94.11 R186.1
  Bottom 0.254: J13.2 15.2,94.02 13.97,95.25 3.81,95.25 v3.17,95.89
N$181
  Top 0.254: R181.1 12.68,99.06 J13._1
N$183
  Top 0.254: R187.1 12.68,93.98 J13._2
OLED-DC^  (via drill 0.38)
  Top 0.254: P2.15 165.1,39.37 161.29,35.56 161.29,33.02 155.57,27.3 141.6,27.3 140.34,26.04 v120.65,26.04 | v114.3,32.38 97.16,32.38 89.53,24.77 78.74,24.77 74.93,20.95 32.38,20.95 29.21,17.78 JP4.4
  Bottom 0.254: v120.65,26.04 v114.3,32.38
OLED-RES^  (via drill 0.38)
  Top 0.254: P2.16 167.64,38.1 165.1,38.1 162.56,35.56 162.56,33.02 155.57,26.04 141.6,26.04 140.34,24.77 v119.38,24.77 | v113.03,31.11 97.16,31.11 90.17,24.13 79.38,24.13 75.56,20.32 62.23,20.32 59.69,17.78 JP4.16
  Bottom 0.254: v119.38,24.77 v113.03,31.11
OUT1-L^  (via drill 0.38)
  Top 0.254: C157.- 31.75,50.16 32.51,50.93 R128.2 32.38,51.56 32.38,52.7 27.94,57.15 27.94,60.96 27.3,61.59 25.4,61.59 24.13,60.33 v15.88,60.33
  Bottom 0.254: P4.1 10.79,57.78 13.34,57.78 v15.88,60.33
OUT1-LB  (via drill 0.38)
  Top 0.254: IC11.7 IC11.6 11.43,55.24 12.06,55.88 v12.06,59.05 6.99,64.14 5.08,64.14 3.17,66.04 C163.2 | v15.24,62.87 19.68,62.87 C160.-
  Bottom 0.254: v12.06,59.05 12.06,59.69 v15.24,62.87
OUT1-LP^
  Top 0.254: P4.2 6.35,53.98 8.89,56.52 IC11.5
OUT1-R^  (via drill 0.38)
  Top 0.254: C141.- 46.99,50.16 47.75,50.93 R121.2 47.62,51.56 47.62,52.07 46.99,52.7 34.92,52.7 v29.84,57.78 | v17.14,59.05 v23.5,59.05
  Bottom 0.254: P4.3 5.08,49.53 6.99,49.53 8.26,50.8 8.26,53.34 11.43,56.52 13.34,56.52 15.88,59.05 v17.14,59.05 | v23.5,59.05 25.4,59.05 26.67,57.78 v29.84,57.78
OUT1-RB  (via drill 0.38)
  Top 0.254: IC11.1 IC11.2 13.97,53.98 13.34,54.61 v13.34,59.69 5.21,67.82 C191.2 | v15.24,61.59 21.59,61.59 C140.-
  Bottom 0.254: v13.34,59.69 v15.24,61.59
OUT1-RP^
  Top 0.254: P4.4 13.97,48.26 17.14,51.44 17.14,54.61 16.51,55.24 IC11.3
OUT-VREF
  Top 0.254: R120.1 R119.1 38.23,50.8 37.59,51.44 36.2,51.44 34.29,49.53 34.29,40.01 | P5.3 P5.2 | 25.4,50.29 R127.1 R126.1 22.86,50.29 22.86,50.8 22.23,51.44 18.41,51.44 | P6.2 P6.3 4.24,79.58 6.99,76.83 6.99,67.94 18.41,56.52 18.41,51.44 | 18.41,51.44 18.41,46.99 17.14,45.72 17.14,43.18 20.32,40.01 31.75,40.01 | 31.75,40.01 34.29,40.01 | 31.75,40.01 31.75,31.11 31.11,30.48 31.11,27.3 29.84,26.04 U$7.5 22.86,26.04 21.59,27.3 U$7.3 | IC12.7 IC12.6 38.73,30.48 39.37,31.11 39.37,34.92 34.29,40.01
  Bottom 0.254: P5.3 P6.3
SPI1-CS0^  (via drill 0.38)
  Top 0.254: P2.17 165.1,36.83 163.83,35.56 163.83,33.02 155.57,24.77 141.6,24.77 140.34,23.5 v118.11,23.5 | v111.76,29.84 97.16,29.84 90.81,23.5 80.01,23.5 76.2,19.68 64.14,19.68 62.23,17.78 JP4.17
  Bottom 0.254: v118.11,23.5 v111.76,29.84
SPI1-CS1^  (via drill 0.38)
  Top 0.254: U5.3 81.58,30.77 82.5,29.84 88.27,29.84 93.34,34.92 v116.84,34.92 | v160.02,34.29 155.57,29.84 141.6,29.84 140.34,28.57 v123.19,28.57
  Bottom 0.254: P2.18 167.64,35.56 161.29,35.56 v160.02,34.29 | v123.19,28.57 v116.84,34.92
SPI1-MISO^  (via drill 0.38)
  Top 0.254: v160.02,33.02 155.57,28.57 141.6,28.57 140.34,27.3 v121.92,27.3 | v115.57,33.66 97.16,33.66 88.9,25.4 83.19,25.4 79.69,28.89 79.69,37.78 81.58,39.66 U5.14
  Bottom 0.254: P2.20 167.64,33.02 v160.02,33.02 | v121.92,27.3 v115.57,33.66
SPI1-MOSI^  (via drill 0.38)
  Top 0.254: U5.2 80.92,30.2 82.55,28.57 v85.09,28.57 | P2.21 163.83,31.75 155.57,23.5 141.6,23.5 140.34,22.23 v116.84,22.23 | v110.49,28.57 97.16,28.57 90.81,22.23 v86.36,22.23 80.01,22.23 73.03,15.24 40.64,15.24 39.37,16.51 JP4.8
  Bottom 0.254: v116.84,22.23 v110.49,28.57 | v85.09,28.57 86.36,27.3 v86.36,22.23
SPI1-SCK^  (via drill 0.38)
  Top 0.254: U5.1 80.28,29.58 83.19,26.67 v85.09,26.67 | P2.22 167.64,30.48 163.83,30.48 155.57,22.23 141.6,22.23 140.34,20.95 v115.57,20.95 | v109.22,27.3 97.16,27.3 90.81,20.95 v85.09,20.95 80.01,20.95 73.66,14.61 38.73,14.61 36.83,16.51 JP4.7
  Bottom 0.254: v115.57,20.95 v109.22,27.3 | v85.09,26.67 v85.09,20.95
(copper drawn outside any net)
  shapes: Top area x1

## Text on the board
tPlace: J | C | OUT1L | OUT1R | IN1L | IN1R | HPR | HPL | GND | aleph/int | 130507